# EAGLE board expo2015 (EAGLE 8.3.2)
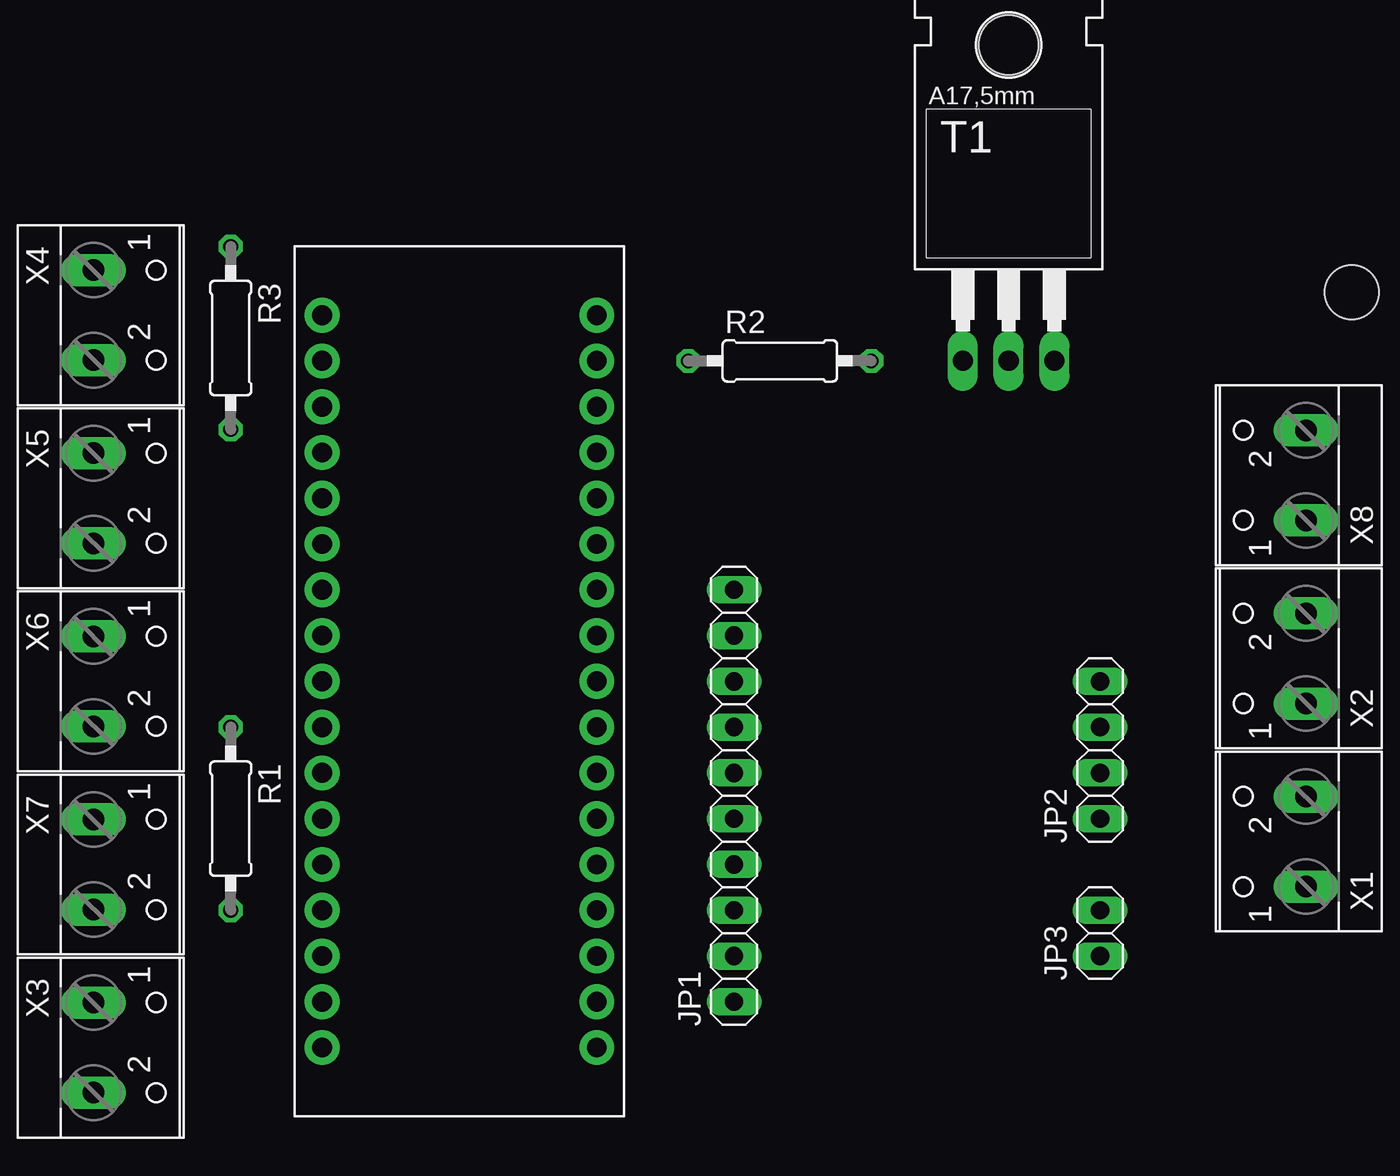
[diagram p0: board, top side]
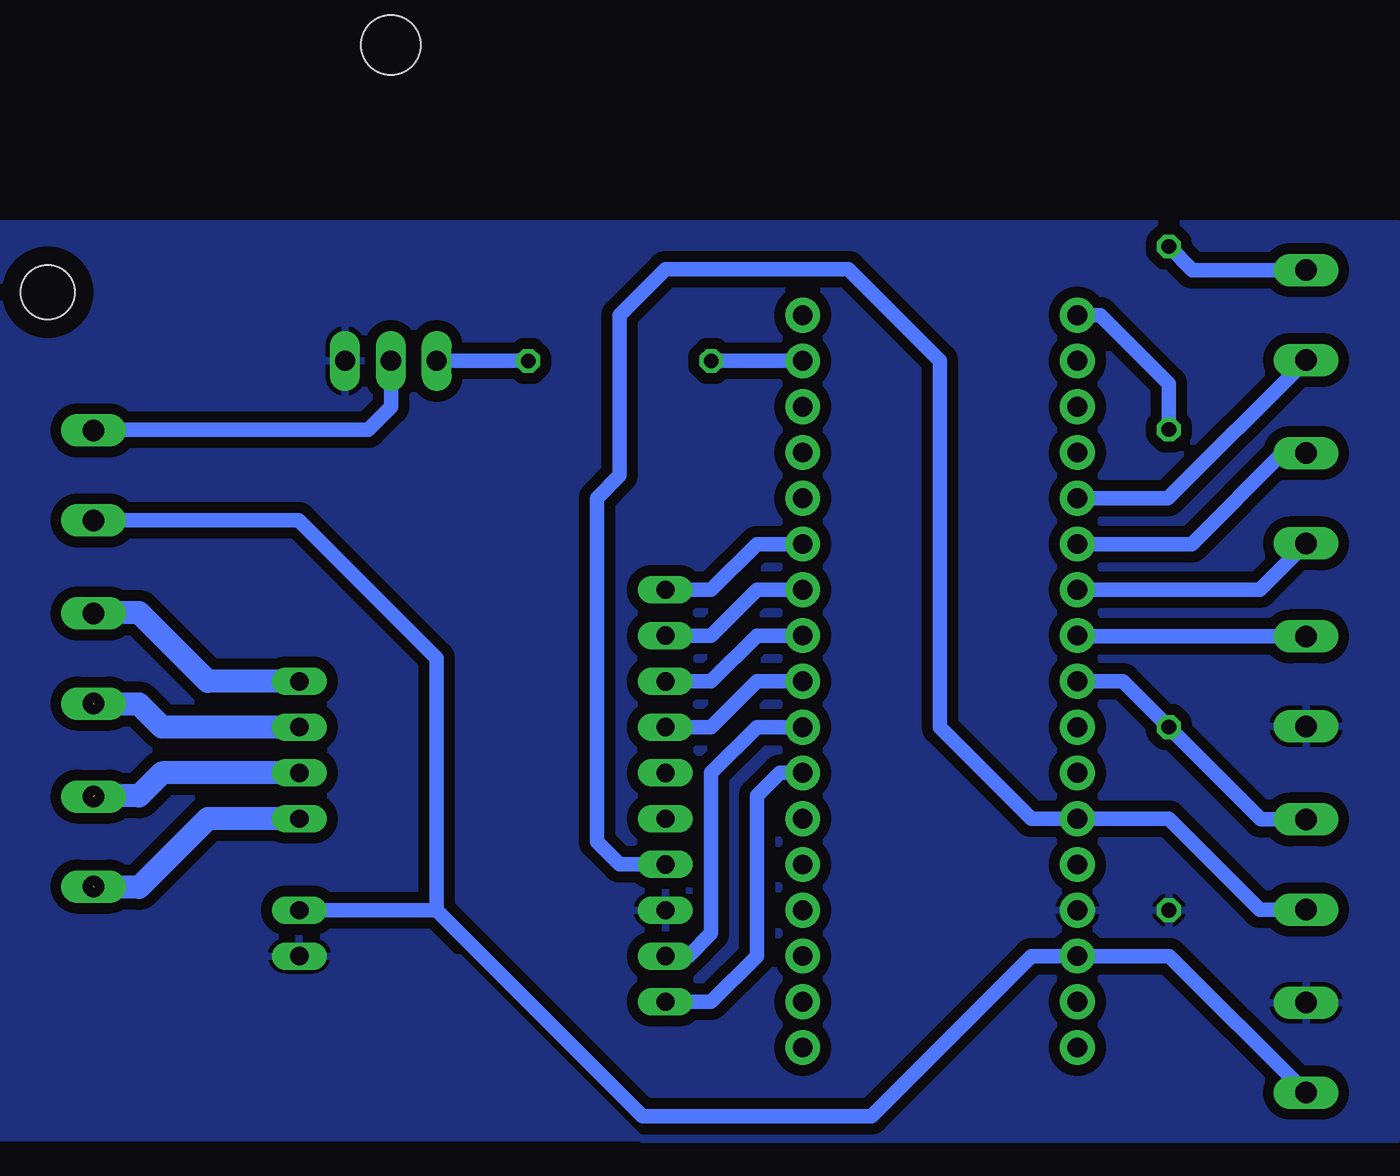
[diagram p1: board, bottom side, seen from below]

No outline drawn. Coordinates in mm, seen from the top.
Copper layers (1*16): Top 0.035mm / dielectric 1.5mm / Bottom 0.035mm
Design rules "default": minimum track width 10mil, minimum drill 24mil, track to track 8mil, track to pad 8mil, pad to pad 8mil, via to via 8mil, smd to smd 8mil, copper to edge 40mil, drill to drill 8mil, minimum pad ring 10mil, minimum via ring 8mil, stop-mask expansion 4mil, vias tented up to drill 0mil, thermal gap 10mil
Holes 3 mm at 74.93,46.99

## Footprints (pad centres in the part's own frame; a part is rotated, then mirrored left to right if it is on the bottom)
1X10 = drill 1.016 long: 1 -11.43,0; 2 -8.89,0; 3 -6.35,0; 4 -3.81,0; 5 -1.27,0; 6 1.27,0; 7 3.81,0; 8 6.35,0; 9 8.89,0; 10 11.43,0
1X04 = drill 1.016 long: 1 -3.81,0; 2 -1.27,0; 3 1.27,0; 4 3.81,0
1X02 = drill 1.016 long: 1 -1.27,0; 2 1.27,0
0207/10 = drill 0.813 octagon: 1 -5.08,0; 2 5.08,0
TO220 = drill 1.118 long: 1 -2.54,-6.35; 2 0,-6.35; 3 2.54,-6.35 | hole 3.302: 0,11.176
ARDUINOMICRO = drill 1.1 pad 1.93: P$1 -20.32,7.62; P$2 -17.78,7.62; P$3 -15.24,7.62; P$4 -12.7,7.62; P$5 -10.16,7.62; P$6 -7.62,7.62; P$7 -5.08,7.62; P$8 -2.54,7.62; P$9 0,7.62; P$10 2.54,7.62; P$11 5.08,7.62; P$12 12.7,-7.62; P$13 10.16,-7.62; P$14 12.7,7.62; P$15 15.24,7.62; P$16 17.78,7.62; P$17 20.32,7.62; P$18 20.32,-7.62; P$19 17.78,-7.62; P$20 15.24,-7.62; P$21 7.62,7.62; P$22 10.16,7.62; P$23 7.62,-7.62; P$24 5.08,-7.62; P$25 2.54,-7.62; P$26 0,-7.62; P$27 -2.54,-7.62; P$28 -5.08,-7.62; P$29 -7.62,-7.62; P$30 -10.16,-7.62; P$31 -12.7,-7.62; P$32 -15.24,-7.62; P$33 -17.78,-7.62; P$34 -20.32,-7.62
W237-102 = drill 1.194 long: 1 -2.5,-1.27; 2 2.5,-1.27

## Placement (x,y rotation side)
JP1  [1X10]  40.64,19.05 90 top
JP2  [1X04]  60.96,21.59 90 top
JP3  [1X02]  60.96,11.43 90 top
R1  [0207/10]  12.7,17.78 270 top
R2  [0207/10]  43.18,43.18 0 top
R3  [0207/10]  12.7,44.45 270 top
T1  BD239  [TO220]  55.88,49.53 0 top
U$1  ARDUINOMICRO  [ARDUINOMICRO]  25.4,25.4 270 top
X1  [W237-102]  71.12,16.51 90 top
X2  [W237-102]  71.12,26.67 90 top
X3  [W237-102]  6.35,5.08 270 top
X4  [W237-102]  6.35,45.72 270 top
X5  [W237-102]  6.35,35.56 270 top
X6  [W237-102]  6.35,25.4 270 top
X7  [W237-102]  6.35,15.24 270 top
X8  [W237-102]  71.12,36.83 90 top

## Library data of the parts
JP1-JP3 = pinhead
R1-R3 = rcl
T1 = transistor-neu-to92
U$1 = adafruit
X1-X8 = con-wago-500; MPN: 237-102; OC_FARNELL: unknown; OC_NEWARK: 70K9898

## Nets
+5V: JP1.4 U$1.P$23 X7.2
GND: JP1.3 JP3.1 R1.2 T1.3 U$1.P$12 X3.1 X6.2
N$1: R2.1 U$1.P$2
N$2: JP1.1 U$1.P$11
N$3: JP1.2 U$1.P$10
N$4: JP1.10 U$1.P$6
N$5: JP2.4 X2.2
N$6: JP2.3 X2.1
N$7: JP2.2 X1.2
N$8: JP2.1 X1.1
N$9: U$1.P$29 X5.1
N$10: U$1.P$30 X4.2
N$11: R2.2 T1.1
N$12: R3.2 U$1.P$34
N$13: R1.1 U$1.P$26 X7.1
N$14: T1.2 X8.2
N$15: U$1.P$27 X6.1
N$16: R3.1 X4.1
N$17: U$1.P$28 X5.2
N$19: JP1.9 U$1.P$7
N$20: JP1.8 U$1.P$8
N$21: JP1.7 U$1.P$9
VCC: JP3.2 U$1.P$20 X3.2 X8.1

## Tracks (layer width: path | path; a pad name or v marks a point on that pad's centre or on a via)
+5V
  Bottom 0.813: JP1.4 43.18,15.24 44.45,16.51 44.45,35.56 43.18,36.83 43.18,45.72 40.64,48.26 30.48,48.26 25.4,43.18 25.4,22.86 20.32,17.78 U$1.P$23 12.7,17.78 7.66,12.74 X7.2
GND
  Bottom 0.813: 12.66,12.66 R1.2
  pour Bottom (isolate 0.61): 0,0 41.91,0 52.07,10.16 78.74,10.16 78.74,50.8 0,50.8
N$1
  Bottom 0.813: U$1.P$2 R2.1
N$2
  Bottom 0.813: U$1.P$11 34.29,20.32 35.56,19.05 35.56,10.16 38.1,7.62 JP1.1
N$3
  Bottom 0.813: U$1.P$10 35.56,22.86 38.1,20.32 38.1,11.43 39.37,10.16 JP1.2
N$4
  Bottom 0.813: U$1.P$6 35.56,33.02 38.1,30.48 JP1.10
N$5
  Bottom 1.27: JP2.4 66.04,25.4 69.85,29.21 72.35,29.21 X2.2
N$6  (1 unrouted)
  Bottom 1.27: JP2.3 68.58,22.86 69.85,24.13 72.35,24.13
N$7  (1 unrouted)
  Bottom 1.27: JP2.2 68.58,20.32 69.85,19.05 72.35,19.05
N$8  (1 unrouted)
  Bottom 1.27: JP2.1 66.04,17.78 69.85,13.97 72.35,13.97
N$9
  Bottom 0.813: X5.1 5.12,38.1 6.35,38.1 11.43,33.02 U$1.P$29
N$10
  Bottom 0.813: X4.2 12.74,35.56 U$1.P$30
N$11
  Bottom 0.813: R2.2 T1.1
N$12
  Bottom 0.813: R3.2 12.7,41.91 16.51,45.72 U$1.P$34
N$13
  Bottom 0.813: X7.1 7.58,17.74 R1.1 15.24,25.4 U$1.P$26
N$14
  Bottom 0.813: T1.2 55.88,40.64 57.15,39.37 72.35,39.37 X8.2
N$15
  Bottom 0.813: X6.1 17.74,27.9 U$1.P$27
N$16
  Bottom 0.813: X4.1 11.39,48.22 R3.1
N$17
  Bottom 0.813: X5.2 7.66,30.48 U$1.P$28
N$18
  pour Bottom (isolate 0.076): 78.74,10.16 52.07,10.16 41.91,0 78.74,0
N$19
  Bottom 0.813: U$1.P$7 35.56,30.48 38.1,27.94 JP1.9
N$20
  Bottom 0.813: U$1.P$8 35.56,27.94 38.1,25.4 JP1.8
N$21
  Bottom 0.813: U$1.P$9 35.56,25.4 38.1,22.86 JP1.7
VCC
  Bottom 0.813: X3.2 12.66,10.16 U$1.P$20 20.32,10.16 29.21,1.27 41.91,1.27 53.34,12.7 | 53.34,12.7 JP3.2 | X8.1 61,34.33 53.34,26.67 53.34,12.7

## Text on the board
bRestrict: Stijn Martens | EXPO 2015